# Altium PCB ELRS-RX-MODULE-V11-20260204.PcbDoc
Units mil, origin at the board's own origin, x right, y up, seen from the top; angles counter-clockwise.
Board outline 433.07 x 669.29 mil, 4 copper layers (TOP, L2, L3, BOTTOM), stack 28.8 mil thick; 75 components, 48 nets, 205 pads, 183 vias.
Unrouted connection lines stored in the file: 125.
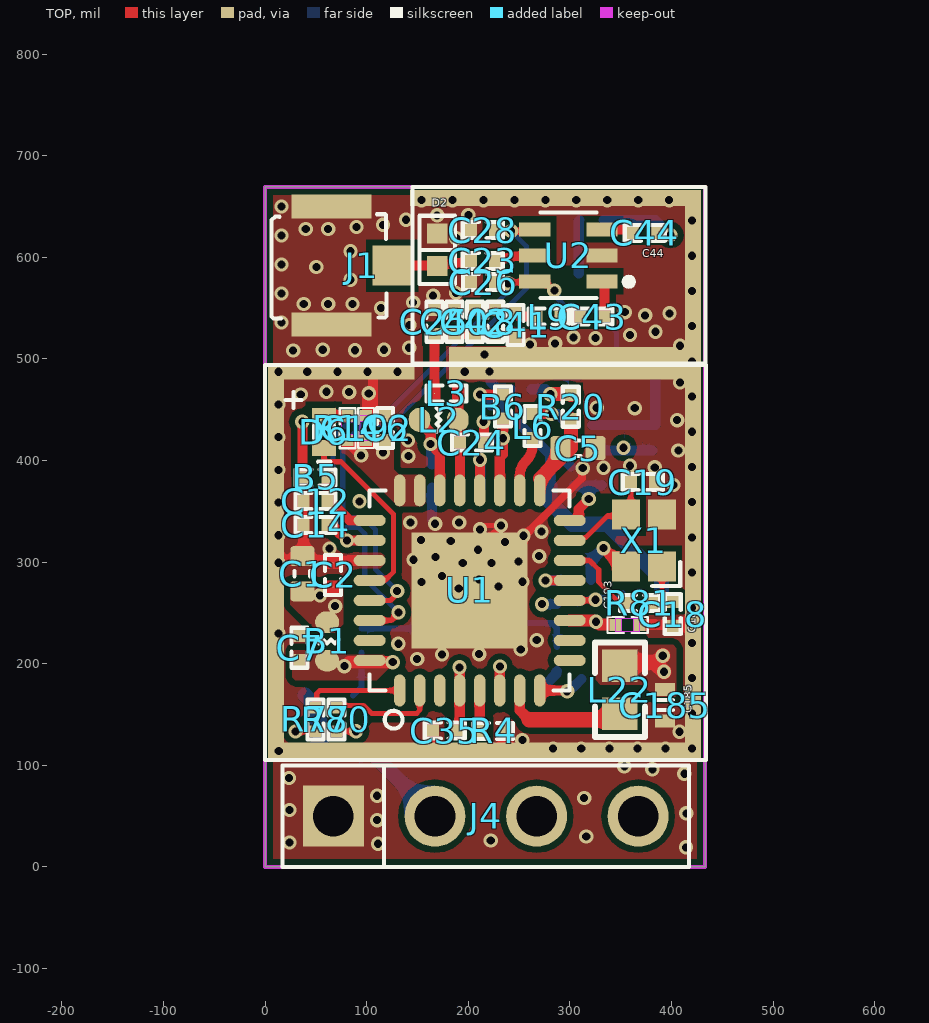
[diagram p0: TOP view]
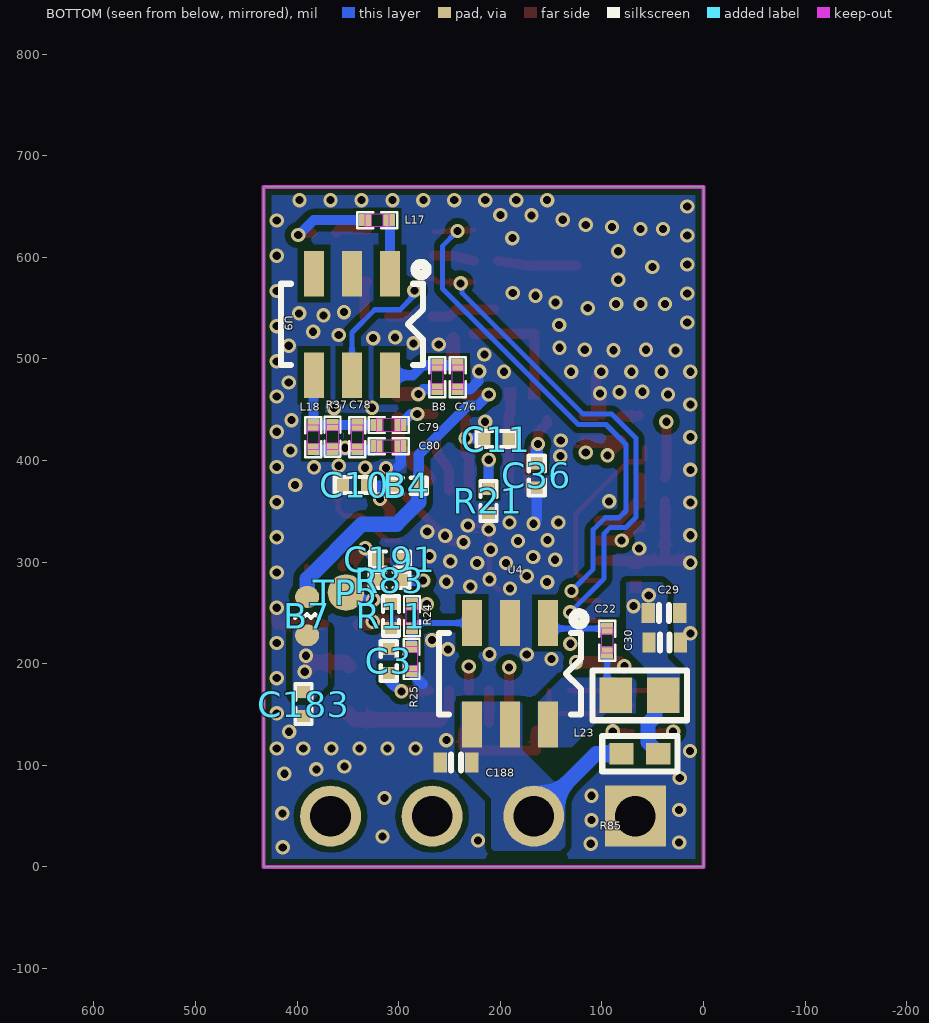
[diagram p1: BOTTOM view, seen from below]
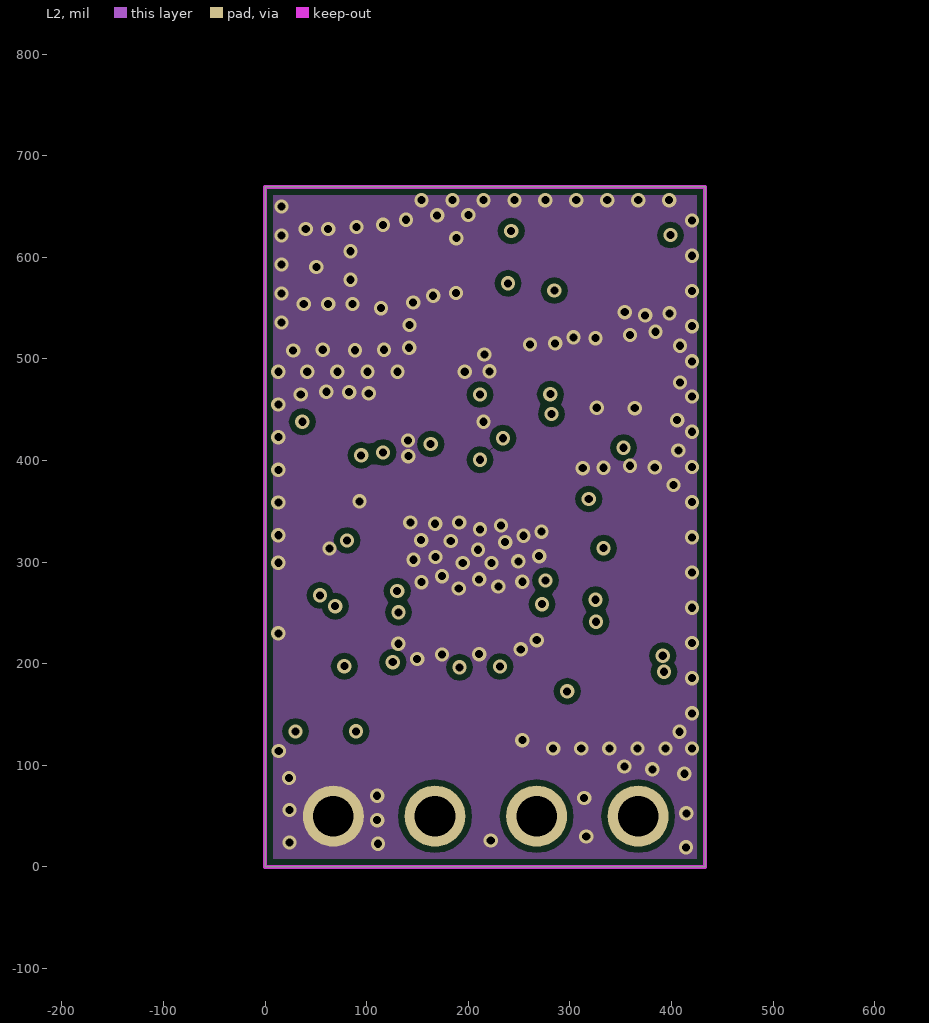
[diagram p2: L2]
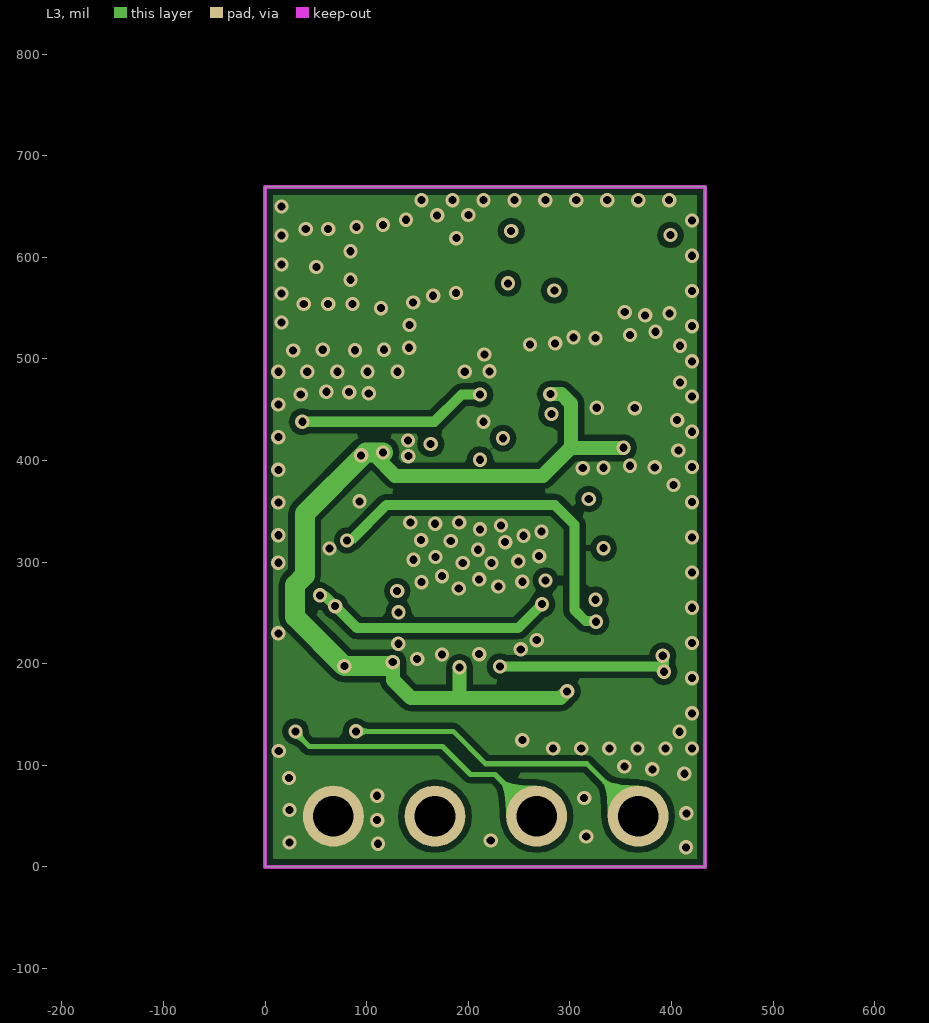
[diagram p3: L3]

## Layer stack, top to bottom
Top Solder: solder mask 0.4, Solder Resist, Dk 3.5
TOP: signal copper 1.2
Dielectric 1: core 8, FR-4, Dk 4.5
L2: signal copper 1.2
Dielectric2: core 8, FR-4, Dk 4.5
L3: signal copper 1.2
Dielectric3: core 8, FR-4, Dk 4.5
BOTTOM: signal copper 1.2
Bottom Solder: solder mask 0.4, Solder Resist, Dk 3.5

## Board outline
0,0 433.07,0 433.07,669.29 0,669.29

## Design rules (kind name [scope] priority, off if disabled: settings)
Clearance poly [All vs InPoly] p1: gap=5.91 ignorepadtopadclearanceinfootprint=TRUE
Clearance [All vs (OnLayer('Keep-Out Layer'))] p2: gap=4 ignorepadtopadclearanceinfootprint=TRUE except(0: Arc-Fill Arc-Poly Arc-Region Track-Fill Track-Poly Track-Region SMDPad-Fill SMDPad-Poly SMDPad-Region THPad-Via THPad-Fill THPad-Poly THPad-Region Via-Fill Via-Poly Via-Region Fill-Fill Fill-Poly Fill-Region Poly-Poly Poly-Region Region-Region)
ComponentClearance [All] p1: gap=0 collisioncheckmode=3 verticalgap=0 showdistances=FALSE
HoleSize [All] p1: absolutevalues=TRUE maxlimit=800 minlimit=1 maxpercent=80.000 minpercent=20.000
HoleToHoleClearance [All] p1: gap=0 allowstackedmicrovias=TRUE
MinimumSolderMaskSliver [All] p1: minsoldermaskwidth=0
PlaneConnect [All] p1: planeconnectstyle=Direct reliefexpansion=20 reliefentries=4 reliefconductorwidth=10 reliefairgap=10
PolygonConnect [All] p1: connectstyle=Direct reliefconductorwidth=10 reliefentries=4 polygonreliefangle="90 Angle" airgapwidth=10
RoutingVias [All] p1: holewidth=7.99 width=14 viastyle="Through Hole" minholewidth=7.99 minwidth=14 maxholewidth=7.99 maxwidth=14
SilkToSilkClearance [All] p1: silktosilkclearance=0
SilkToSolderMaskClearance [IsPad] p1: minsilkscreentomaskgap=0 clearancetoexposedcopper=TRUE
SolderMaskExpansion [All] p1: expansion=4 istentingtop=FALSE
SupplyNets "Schematic Supply Nets_11" [InNet('GND')] p1: voltage=0.000
SupplyNets "Schematic Supply Nets_1" [InNet('VBAT_BG-3V3')] p2: voltage=0.000
SupplyNets "Schematic Supply Nets_4" [InNet('VBAT_3V3')] p3: voltage=0.000
SupplyNets "Schematic Supply Nets_10" [InNet('VREG_1V5_OUT')] p4: voltage=0.000
SupplyNets "Schematic Supply Nets_9" [InNet('VDD_IO_1V8')] p5: voltage=0.000
SupplyNets "Schematic Supply Nets_8" [InNet('VCC_5V')] p6: voltage=0.000
SupplyNets "Schematic Supply Nets_7" [InNet('AVDD_SX_1V5')] p7: voltage=0.000
SupplyNets "Schematic Supply Nets_6" [InNet('VDD_DCIN_1V5')] p8: voltage=0.000
SupplyNets "Schematic Supply Nets_3" [InNet('VCC_3V3')] p9: voltage=0.000
SupplyNets "Schematic Supply Nets_2" [InNet('AVDD_TX_1V5')] p10: voltage=0.000
SupplyNets "Schematic Supply Nets" [InNet('PALDO1V3_OUT')] p11: voltage=0.000
Width [All] p1: maxlimit=100 minlimit=5 preferedwidth=10
23 further rules are at their usual default settings.

## Classes and differential pairs
component class 01_SOC: C18 C19 C191 R4 R11 R21 R81 R83 U1 X1
component class 02_RF: B8 C23 C24 C25 C26 C28 C36 C40 C41 C42 C43 C44 C76 C78 C79 C80 D2 J1 L2 L3 L6 L8 L9 L17 L18 R37 U2 U9
component class 03_Power: B1 B4 B5 B6 B7 C1 C2 C3 C5 C6 C7 C10 C11 C12 C14 C22 C29 C30 C35 C183 C185 C188 C192 C193 L22 L23 R20 R24 R25 R85 U4
component class 04_UART: D6 J4 R14 R77 R80 TP5

## Components (designator, comment, footprint, x,y, rotation, side; value= is the part's Value field where it differs from the comment)
B1 "120_100MHz" L0402 61.02,222.05 r90 top
B4 "1KR_100MHz/200mA" 0201#1 292.13,375.2 r0 bottom
B5 "1KR_100MHz/200mA" 0201#1 49.61,383.46 r0 top
B6 "1KR_100MHz/200mA" 0201#1 234.01,453 r270 top
B7 "120_100MHz" L0402 390.16,246.85 r270 bottom
B8 "1KR_100MHz/200mA" 0201#2 262,482 r270 bottom
C1 "22uF/16V" C0402 36.61,288.58 r90 top
C2 "1uF/10V" 0201#3 66.93,287.4 r90 top
C3 "100nF/10V" 0201#1 309.84,202.76 r90 bottom
C5 "22uF/16V" C0402 307.88,412.2 r0 top
C6 "100nF/10V" 0201#1 118.06,432.17 r90 top
C7 "100nF/10V" 0201#1 33.86,215.75 r90 top
C10 "100nF/10V" 0201#1 343.31,375.98 r0 bottom
C11 "100nF/10V" 0201#1 204,421.21 r180 bottom
C12 "100nF/10V" 0201#1 49.61,360.04 r180 top
C14 "100nF/10V" 0201#1 49.61,336.61 r180 top
C18 "8pF/6.3V/NC" 0201#1 401.18,248.82 r270 top
C19 "8pF/6.3V" 0201#1 371.65,378.74 r0 top
C22 "22nF" 0201#2 94.88,222.83 r270 bottom
C23 "56pF/6.3V" 0201#1 214.17,596.46 r180 top
C24 "NC" 0201#1 203.5,417.68 r0 top
C25 "NC" 0201#1 166.54,536.62 r90 top
C26 "100nF/10V" 0201#1 214.57,575.59 r180 top
C28 "100nF/10V" 0201#1 214.17,626.77 r180 top
C29 "10uF 10V" 0402C_MIN 38.98,250 r180 bottom
C30 "10uF 10V" 0402C_MIN 38.19,220.87 r180 bottom
C35 "100nF/10V" 0201#1 176.77,134.25 r180 top
C36 "100nF/10V" 0201#1 164.17,385.43 r270 bottom
C40 "6.8pF" 0201#1 186.52,536.62 r90 top
C41 "4.3pF" 0201#1 246.46,533.47 r270 top
C42 "1.5pF" 0201#1 206.5,536.62 r90 top
C43 "56pF/6.3V" 0201#1 322.05,541.73 r0 top
C44 "56pF/6.3V" 0201#1 373.62,624.02 r180 top
C76 "100nF 16V" 0201#2 242,482 r90 bottom
C78 "2.2pF" 0201#2 340.85,422.98 r270 bottom
C79 "1.5pF" 0201#2 310,434.98 r0 bottom
C80 "100nF 16V" 0201#2 310,414.13 r180 bottom
C183 "100nF/10V" 0201#1 393.7,160.24 r90 bottom
C185 "10uF 10V" 0402C_MIN 393.31,159.25 r270 top
C188 "10uF 10V" 0402C_MIN 243.7,102.76 r0 bottom
C191 "100nF/10V" 0201#1 308.66,302.76 r0 bottom
C192 "1uF/10V" 0201#2 99.31,432 r90 top
C193 "100nF/10V" 0201#2 356.69,238.19 r0 top
D2 "RCLAMP0521P.TCT-MS" TVS-0402 169.29,607.48 r90 top
D6 "LED_Green" LED0402 57.87,428.35 r90 top
J1 "IPEX-1" IPEX-1 95.15,591.93 r180 top
J4 "CON4" SIP1X4P 217.15,50 r0 top
L2 "220nH LQW15CNR22J10D" L0402 170.79,440.03 r180 top
L3 "4.7nH" 0201#3 178.35,466.14 r180 top
L6 "12nH" 0201#1 263.25,434.01 r90 top
L8 "7.5nH" 0201#1 226.48,536.62 r90 top
L9 "8.2nH" 0201#1 278.74,541.73 r0 top
L17 "7.5nH" 0201#2 321.26,636.61 r0 bottom
L18 "6.2nH" 0201#2 384,422.98 r270 bottom
L22 "2.2UH 0.75A" C0603 349.21,174.41 r90 top
L23 "4.7uH" R0603 62.99,168.9 r180 bottom
R4 "100K/1%" 0201#1 224.41,133.86 r0 top
R11 "100K/1%" 0201#1 307.48,246.85 r270 bottom
R14 "1K" 0201#2 81.1,431.89 r270 top
R20 "1KR_100MHz/200mA" 0201#1 300.79,452.95 r270 top
R21 "49.9k/1%" 0201#1 211.81,360.24 r270 bottom
R24 "100K" 0201#2 287.01,246.85 r270 bottom
R25 "24K" 0201#2 287.4,204.73 r270 bottom
R37 "750R" 0201#2 365.18,423.37 r90 bottom
R77 "22" 0201#1 49.61,145.28 r270 top
R80 "22" 0201#1 70.08,145.28 r270 top
R81 "NC" 0201#1 368.9,259.84 r0 top
R83 "0R" 0201#1 309.06,282.28 r0 bottom
R85 "0R_NC" R0402 62.71,111.42 r180 bottom
TP5 "NC" TP1_6MM 351.97,270.08 r180 bottom
U1 "TK8620" QFN32_8620 201.33,272.17 r90 top
U2 "AS179-92" SC70-6 298.36,601.92 r90 top
U4 "MT2492" SOT23-6 190.55,190.16 r270 bottom
U9 "MS2630" SOT23-6 346,534 r270 bottom
X1 "X1E0002510059" SMD2016-4P 372.83,321.26 r90 top

## Footprints (in the part's own frame and the unit in brackets; to place one, negate y for a bottom-side part, rotate by r counter-clockwise, add the part's x,y. Pads: shape width x height; smd on the part's side, far side on the other; paste and mask are expansions set on the pad)
0201#1 [mil] "0201"
  rect 11.81x11.81 smd: 1(-11.81,0) 2(11.81,0)
  silkscreen extent -20,-8 20,8, body extent -21,-9 21,9, height 150
0201#2 [mil] "0201"
  rect 11.81x11.81 smd: 1(-11.81,0) 2(11.81,0)
  TOP keep-out region: -5.98,5.98 -5.98,-5.98 5.98,-5.98 5.98,5.98
  TOP keep-out region: -12.01,5.98 -12.01,-5.98 12.01,-5.98 12.01,5.98
  silkscreen extent -20,-8 20,8, body extent -21,-9 21,9, height 150
0201#3 [mil] "0201"
  round 1 smd: 1(-11.81,0) 2(11.81,0)
  TOP region: 17.71,5.9 5.9,5.9 5.9,-5.9 17.71,-5.9
  TOP region: -5.9,5.9 -17.71,5.9 -17.71,-5.9 -5.9,-5.9
  silkscreen extent -20,-8 20,8, body extent -21,-9 21,9, height 150
0402C_MIN [mil] "0402C_MIN"
  rect 12.99x19.69 smd: 1(-15.55,0) 2(15.55,0)
  silkscreen extent -5,-8 5,8, body extent -27,-15 27,15, height 150
C0402 [mil] "C0402"
  rrect30% 19.67x23.61 smd: 1(-17.32,0) 2(17.32,0)
  silkscreen extent -2,-7 3,8, body extent -35,-17 35,18, height 150
C0603 [mil] "C0603"
  rect 32x35 smd: 1(-23.5,0) 2(23.5,0)
  silkscreen extent -46,-25 46,25, body extent -49,-27 49,27, height 150
IPEX-1 [mm] "IPEX-1"
  rect 1x1 smd: 1(-0.762,0)
  rect 2x0.6 smd: 2(0.762,-1.476) 3(0.762,1.476)
  silkscreen extent -0.62,-1.28 2.26,1.32, body extent -1.36,-2.08 1.94,2.08, height 3.81
L0402 [mm] "L0402"
  oval 0.54x0.6 smd: 1(0.48,0) 2(-0.48,0)
  silkscreen extent -0.05,-0.3 0.05,0.3, body extent -0.8,-0.4 0.8,0.4, height 3.81
LED0402 [mil] "LED0402"
  rect 15.75x23.62 smd: 1(15.75,0) 2(-15.75,0)
  silkscreen extent -30,-10 39,38, body extent -32,-13 45,13, height 150
QFN32_8620 [mil] "QFN32_8620"
  oval 31.5x11.02 smd: 1(-98.43,68.9) 2(-98.43,49.21) 3(-98.43,29.53) 4(-98.43,9.84) 5(-98.43,-9.84) 6(-98.43,-29.53) 7(-98.43,-49.21) 8(-98.43,-68.9) 17(98.43,-68.9) 18(98.43,-49.21) 19(98.43,-29.53) 20(98.43,-9.84) 21(98.43,9.84) 22(98.43,29.53) 23(98.43,49.21) 24(98.43,68.9)
  oval 11.02x31.5 smd: 9(-68.9,-98.43) 10(-49.21,-98.43) 11(-29.53,-98.43) 12(-9.84,-98.43) 13(9.84,-98.43) 14(29.53,-98.43) 15(49.21,-98.43) 16(68.9,-98.43) 25(68.9,98.43) 26(49.21,98.43) 27(29.53,98.43) 28(9.84,98.43) 29(-9.84,98.43) 30(-29.53,98.43) 31(-49.21,98.43) 32(-68.9,98.43)
  rect 114.17x114.17 smd: 33(0,0)
  silkscreen extent -136,-98 98,98, body extent -118,-118 118,118, height 150
R0402 [mil] "R0402"
  rect 24x21 smd: 1(-18,0) 2(18,0)
  silkscreen extent -37,-18 37,18, body extent -40,-20 40,20, height 150
R0603 [mil] "R0603"
  rect 32x35 smd: 1(-23.5,0) 2(23.5,0)
  silkscreen extent -46,-25 46,25, body extent -49,-27 49,27, height 150
SC70-6 [mm] "SC70-6"
  rect 0.35x0.78 smd: 1(-0.65,-0.84) 2(0,-0.84) 3(0.65,-0.84) 4(0.65,0.84) 5(0,0.84) 6(-0.65,0.84)
  silkscreen extent -1.07,-1.69 1.07,0.7, body extent -1.19,-1.36 1.19,1.36, height 3.81
SIP1X4P [mil] "SIP1X4P"
  rect 60x60 / inner round 60 / far side rect 60x60 hole 40: 1(-150,0)
  round 60 hole 40: 2(-50,0) 3(50,0) 4(150,0)
  silkscreen extent -200,-50 200,50
SMD2016-4P [mm] "SMD2016-4P"
  rect 0.749x0.701 smd: 1(-0.65,-0.45) 2(0.65,-0.45) 3(0.65,0.45) 4(-0.65,0.45)
  silkscreen extent -1.14,-0.91 -0.54,-0.21, body extent -1.16,-0.85 1.07,0.93, height 3.81
SOT23-6 [mil] "SOT23-6"
  rect 45x20 smd: 1(-50,37.4) 2(-50,0) 3(-50,-37.4) 4(50,-37.4) 5(50,0) 6(50,37.4)
  silkscreen extent -60,-70 40,74, body extent -90,-70 90,70, height 150
TP1_6MM [mil] "TP1_6MM"
  round 36 smd: 1(0,0)
  body extent -20,-20 20,20, height 150
TVS-0402 [mil] "TVS-0402"
  rect 20x20 smd: 1(-15.98,0) 2(15.98,0)
  silkscreen extent -34,-18 34,17, body extent -22,-12 22,12, height 150

## Part data
B1: library part 1212_BEAD_0, "FERRITE CHIP 120 OHM 500MA 0402", Manufacture Part Number=BLM15AG121SN1D, Oper. Temp. Range="-55C to 85C", Package=L0201, Tolerance=25%, CLASS=DISCRETE, eI Part#=04_00075_01, Mfg=Murata, Mfg Part#=BLM15AG121SN1D, Part Reference=B1, PCB Footprint=l0402, ProcessType=SMT, RoHS=Yes, Vendor=DigiKey, Vendor Part#=490-1005-1-ND
B4 B5 B6 B7: library part 1212_BEAD_0, "FERRITE CHIP 120 OHM 500MA 0402", Manufacture Part Number=BLM15AG121SN1D, Oper. Temp. Range="-55C to 85C", Package=0402, Tolerance=25%, CLASS=DISCRETE, eI Part#=04_00075_01, Mfg=Murata, Mfg Part#=BLM15AG121SN1D, ProcessType=SMT, RoHS=Yes, Vendor=DigiKey, Vendor Part#=490-1005-1-ND
  B4: Part Reference=B4, PCB Footprint=0201
  B5: Part Reference=B5, PCB Footprint=0201
  B6: Part Reference=B6, PCB Footprint=0201
  B7: Part Reference=B7, PCB Footprint=l0402
B8 L23: library part INDUCTOR_Dup1
  B8: FPLIST=0402R_S,0402R,0402R_M,0402R_MIN,R0402, Part Reference=B8, PCB Footprint=0201, Reviewed2=LBY, 型号="1.5K 1%", 存货名称=贴片电阻, 存货简称=TURBO, 存货编码=040101070, 规格=贴装碳膜电阻器－1.5KR－±1%－1/16W－0402
  L23: Part Reference=L23, PCB Footprint=R0603, Reviewed=LBY
C1: library part "Ceramic Capacitor", "Ceramic Capacitor, 10uF,+/-20%,X6S,16V,SMD,0603", Manufacturer=Murata, Manufacturer P/N=GRM188C81C106MA73D, Reserve Value=10uF, Datasheet="Ceramic Capacitor.pdf", Myir P/N=2040100037, Part Reference=C1, Part Type="Ceramic Capacitor", PCB Footprint=C0402
C2 C192: library part "Ceramic Capacitor", "Ceramic Capacitor,4.7uF 10V 0402,SUMSUNG", Manufacturer=Samsung, Manufacturer P/N=CL05A475MP5NRNC, Reserve Value=4.7uF, Datasheet=CL05A475MP5NRNC.pdf, Myir P/N=2040180055, Part Type="Ceramic Capacitor", PCB Footprint=0201
  C2: Part Reference=C2
  C192: Part Reference=C192
C3 C5 C6 C7 C10 C11 C12 C14 C26 C28 C35 C36 C193: library part "Ceramic Capacitor_14", "Ceramic Capacitor,100nF,50V,+/-10%,X7R,0402,Fenghua", Manufacturer=Fenghua, Manufacturer P/N=0402B104K500NT, Reserve Value=100nF, Datasheet="附件7 风华片容全系列承认书.pdf", Myir P/N=2040180111, Part Type="Ceramic Capacitor"
  C3: Part Reference=C3, PCB Footprint=0201
  C5: Part Reference=C5, PCB Footprint=C0402
  C6: Part Reference=C6, PCB Footprint=0201
  C7: Part Reference=C7, PCB Footprint=0201
  C10: Part Reference=C10, PCB Footprint=0201
  C11: Part Reference=C11, PCB Footprint=0201
  C12: Part Reference=C12, PCB Footprint=0201
  C14: Part Reference=C14, PCB Footprint=0201
  C26: Part Reference=C26, PCB Footprint=0201
  C28: Part Reference=C28, PCB Footprint=0201
  C35: Part Reference=C35, PCB Footprint=0201
  C36: Part Reference=C36, PCB Footprint=0201
  C193: Part Reference=C193, PCB Footprint=0201
C18 C19 C23 C24 C25 C40 C41 C42 C43 C44 C76 C78 C79 C80 C191: library part "Ceramic Capacitor", "Ceramic Capacitor,22uF,6.3V,+/-20%,X5R,0603,Samsung", Manufacturer=Samsung, Manufacturer P/N=CL10A226MQ8NRNC, Reserve Value=22uF, Datasheet=Samsung.pdf, Myir P/N=20401.00086, Part Type="Ceramic Capacitor", PCB Footprint=0201
  C18: Part Reference=C18
  C19: Part Reference=C19
  C23: Part Reference=C23
  C24: Part Reference=C24
  C25: Part Reference=C25
  C40: Part Reference=C40
  C41: Part Reference=C41
  C42: Part Reference=C42
  C43: Part Reference=C43
  C44: Part Reference=C44
  C76: Part Reference=C76
  C78: Part Reference=C78
  C79: Part Reference=C79
  C80: Part Reference=C80
  C191: Part Reference=C191
C22 C29 C30: library part "CAPACITOR NON-POL"
  C22: Part Reference=C22, PCB Footprint=0201
  C29: Part Reference=C29, PCB Footprint=0402C_MIN
  C30: Part Reference=C30, PCB Footprint=0402C_MIN
C183 C185 C188: library part CAP_NP, FPLIST=0402C_S,0402C,0402C_M,0402C_MIN,0402C-BGA,C0402, 存货名称=贴片电容, 存货简称=TURBO
  C183: Part Reference=C183, PCB Footprint=0201, 型号="100nF 16V", 存货编码=040203017, 规格=贴片电容－0.1uF－±10%－16V－X7R－0402
  C185: Part Reference=C185, PCB Footprint=0402C_MIN, 型号="10uF 6.3V", 存货编码=040203157, 规格=贴片电容－10uF－±20%－6.3V－X5R－0402
  C188: Part Reference=C188, PCB Footprint=0402C_MIN, 型号="10uF 6.3V", 存货编码=040203157, 规格=贴片电容－10uF－±20%－6.3V－X5R－0402
D2: library part TVS, Part Reference=D2, PCB Footprint=TVS-0402
D6: library part MFOE1101_0, Part Reference=D6, PCB Footprint=LED0402
L2 L3 L6 L8 L9 L22: library part INDUCTOR_Dup2
  L2: Part Reference=L2, PCB Footprint=L0402
  L3: Part Reference=L3, PCB Footprint=0201
  L6: Part Reference=L6, PCB Footprint=0201
  L8: Part Reference=L8, PCB Footprint=0201
  L9: Part Reference=L9, PCB Footprint=0201
  L22: FPLIST=0603L_S,0603L,0603L_M,0603L_MIN, Part Reference=L22, PCB Footprint=C0603, Reviewed2=LBY
L17 L18: library part INDUCTOR, PCB Footprint=0201
  L17: Part Reference=L17
  L18: Part Reference=L18
R4 R11 R20 R21 R37 R81: library part Resister, "Thick Film Resistor,0R,+/-5%,1/16W,-55°C ~ 155°C,SMD,0402,Fenghua", Manufacturer=Fenghua, Manufacturer P/N=RC-02000JT, Reserve Value=0R, Datasheet=FH规格书_2018-07-30.pdf, Myir P/N=20301.00186, Part Type="Thick Film Resistor", PCB Footprint=0201
  R4: Part Reference=R4
  R11: Part Reference=R11
  R20: Part Reference=R20
  R21: Part Reference=R21
  R37: Part Reference=R37
  R81: Part Reference=R81
R14: library part R_0, Part Reference=R14, PCB Footprint=0201
R24 R25 R85: library part R
  R24: Part Reference=R24, PCB Footprint=0201
  R25: Part Reference=R25, PCB Footprint=0201
  R85: Part Reference=R85, PCB Footprint=R0402
R77 R80: library part RES, FPLIST=0402R_S,0402R,0402R_M,0402R_MIN,R0402, PCB Footprint=0201, 型号="110K 1%", 存货名称=贴片电阻, 存货简称=TURBO, 存货编码=040101199, 规格=贴装碳膜电阻器－110KR－±1%－1/16W－0402
  R77: Part Reference=R77
  R80: Part Reference=R80
R83: library part Resister, "Thick Film Resistor,0R,+/-5%,1/16W,-55°C ~ 155°C,SMD,0402,Fenghua", Manufacturer=Fenghua, Manufacturer P/N=RC-02000JT, Datasheet=FH规格书_2018-07-30.pdf, Myir P/N=20301.00186, Part Reference=R83, Part Type="Thick Film Resistor", PCB Footprint=0201, Reserve Value=0R
TP5: library part "T POINT R", Part Reference=TP5, PCB Footprint=TP1_6MM
U1: library part K2201A_3, Part Reference=U1, PCB Footprint=QFN32_8620
X1: library part Crystal_32M, Part Reference=X1, PCB Footprint=smd2016-4p
J1: Part Reference=J1, PCB Footprint=IPEX-1
J4: Part Reference=J4, PCB Footprint=SIP1X4P
U2: Part Reference=U2, PCB Footprint=SC70-6
U4: Part Reference=U4, PCB Footprint=SOT23-6
U9: Part Reference=U9, PCB Footprint=SOT23-6

## Free pads (board coordinates)
  rect 15.75x385.83 smd: 0(10.63,302.76) 0(420.87,299.61)
  rect 141.73x15.75 smd: 0(75.98,487.8)
  rect 426x15.75 smd: 0(215.75,114.57)
  rect 275.59x15.75 smd: 0(280.31,658.46)
  rect 236.22x15.75 smd: 0(298.82,503.94)
  rect 248.03x15.75 smd: 0(304.72,487.8)
  rect 15.75x175.2 smd: 0(420.87,578.74)

## Via types
v1: diameter 14, hole 7.99, TOP to BOTTOM, tented both sides, 117 vias
v2: diameter 14, hole 7.99, TOP to BOTTOM, 50 vias
v3: diameter 14, hole 8, TOP to BOTTOM, tented both sides, 16 vias

## Nets (pads, with @x,y where several pads share a name; then routed paths per layer and width w, separated by ;. In a path a pad name is that pad's centre, name@x,y a point inside that pad or via, vN(x,y) a via of type N, cw(c..) or ccw(c..) an arc to the next point about the centre after c; other vN are vias at no path point)
AVDD_SX_1V5: B4.2 C10.1 U1.16 | length 74.7
  TOP w10: U1.16 308.19,341.07 308.66,341.54 308.66,352.36 v3(318.5,362.2)
  BOTTOM w10: B4.2 330.71,375.2 C10.1 ; v3(318.5,362.2) 318.5,375.2
AVDD_TX_1V5: B5.2 C12.1 U1.25 | length 71.2
  TOP w10: B5.2@61.81,383.46 61.81,363.39 61.42,362.99 83.34,341.07 U1.25
BUCK_SW: L22.1 U1.7 | length 124.6
  TOP w10: U1.7 250.54,154.18 259.84,144.88
  TOP w15: 259.84,144.88 343.19,144.88 L22.1
DC_TP: R21.1 U1.20 | length 46.6
  TOP w10: U1.20 211.37,370.8 211.37,381.76 211.42,381.81 v1@211.42,394.49
  BOTTOM w10: v1@211.42,394.49 211.81,394.09 R21.1
  other v1: 211.42,400.79
EFUSE: R4.1 U1.5 | length 32.2
  TOP w10: 211.17,141.59 U1.5
ELRS_RXD: J4.4 R80.2 | length 332.2
  TOP w5: R80.2 86.22,133.47 v3(89.37,133.46)
  L3 w5: v3(89.37,133.46) 185.04,133.46 216.93,101.57 316.54,101.57 367.15,50.96 J4.4
ELRS_TXD: J4.3 R77.2 | length 292.4
  TOP w5: v3@29.95,133.47 R77.2
  L3 w5: v3(29.92,133.44) 29.92,131.89 43.31,118.5 174.52,118.5 202.08,90.94 226.21,90.94 J4.3
GND: C1.2 C2.2 C3.2 C5.2 C6.2 C7.2 C10.2 C11.2 C12.2 C14.2 C18.2 C19.2 C24.2 C25.2 C26.2 C28.2 C29.2 C30.2 C35.2 C36.2 C40.2 C41.2 C76.1 C80.2 C183.1 C185.2 C188.2 C191.1 C192.2 C193.2 D2.2 J1.2 J1.3 J4.1 pad.0 R4.2 R11.2 R21.2 R25.2 U1.27 U1.33 U2.2 U4.2 U9.2 X1.2 | length 746.5
  TOP w5: U1.33 210.56,281.4 210.56,331.43 v1(211.42,332.28) 211.88,332.28 215.6,336 v1(232,336)
  TOP w7.87: C192.2 99.31,461.82 101.97,464.48 v1(101.97,466.14) ; v1(236.22,319.68) 248.85,319.68 U1.33@254.48,325.32 ; U1.33@254.48,325.34 311.7,382.56 311.7,391.62 v1(312.6,392.52)
  TOP w10: pad.0@11.29,301.7 U1.27 ; C1.2 37.8,307.08 C14.2 C12.2 ; pad.0@100.9,487.8 106,482.7 106,443.81 C6.2@118.06,443.81 ; pad.0@164.96,114.57 233.35,114.57 236.22,117.44 R4.2 ; C35.2 164.96,117.44 pad.0@167.84,114.57 ; v1(214.96,438.19) 215.31,437.84 C24.2 ; C193.2@373.62,238.58 pad.0@419.57,238.58 ; pad.0@417.99,238.58 420.87,241.46 pad.0@420.87,255.12
  TOP w13.2: pad.0@246.46,502.85 C41.2@246.46,519.69
  BOTTOM w10: C36.2 164.17,342.03 167.32,338.88 v1(167.32,337.8) ; v2(220.87,487.8) 221.63,487.03 221.63,477.97 229.2,470.41 241.78,470.41 C76.1 ; 276.38,179.92 286.5,190.04 286.5,192.01 R25.2 ; C80.2 298.19,396.69 300.79,394.09
  other v1: 414.17,19.29 111.02,22.83 24,24 222,26 316,30 110.24,46.06 414.57,52.76 24,56 314,68 110.24,70.08 23.42,87.42 412.6,91.73 381.1,96.06 353.54,98.82 253.15,124.8 407.87,133.07 149.61,204.72 174.02,209.06 210.63,209.45 251.57,214.17 131.1,219.68 267.32,223.23 190.55,274.02 229.53,275.98 153.94,280.31 253.15,280.71 210.63,283.07 174.02,286.22 194.49,299.21 222.83,299.21 249.21,300.79 146.06,302.36 167.72,305.12 269.68,305.91 209.45,312.2 182.68,320.87 153.54,321.65 254.33,325.98 272,330 142.91,338.98 190.94,338.98 92.91,359.84 401.97,375.98 333.07,392.91 383.46,393.31 359.06,394.88 140.94,404.33 406.69,409.84 140.55,419.68 405.51,439.76 326.38,451.97 363.78,451.57 35.04,464.96 82.68,467.32 60.24,467.72 408.27,476.77 215.75,504.33 27.56,508.27 56.69,509.06 88.52,508.52 116.93,509.06 260.63,514.17 285.43,515.35 325.2,520.47 303.54,521.26 359.06,523.62 384.25,526.77 16,536 374.02,542.91 398.03,544.88 353.94,546.06 114,550 38,554 62,554 86,554 165.35,562.2 16,564.5 187.8,564.96 84,578 50.39,590.55 16,593 84,606 188.19,618.9 16,621.5 40,628 62,628 90,630 116,632 138.58,637.01 169.29,641.34 200,641.73 16,650
  other v2: 13.39,114.17 283.46,116.54 311.1,116.54 338.74,116.54 366.38,116.54 394.02,116.54 420.08,116.54 420.08,151.18 420.08,185.83 420.08,220.47 12.99,229.92 420.08,255.12 420.08,289.76 12.99,299.41 63.39,313.39 420.08,324.41 12.99,326.48 12.99,358.66 420.08,359.05 12.99,390.85 420.08,393.7 12.99,423.03 420.08,428.35 12.99,455.22 420.08,462.99 12.99,487.4 41.44,487.4 71.06,487.4 100.69,487.4 130.31,487.4 196.46,487.4 420.08,497.64 141.73,511.02 408.27,512.99 420.08,532.28 142.13,533.46 145.67,555.51 420.08,566.93 420.08,601.57 420.08,636.22 153.94,656.3 184.4,656.3 214.86,656.3 245.32,656.3 275.79,656.3 306.25,656.3 336.71,656.3 367.18,656.3 397.64,656.3
GPIO_0: D6.2 U1.28 | length 185.5
  TOP w5: D6.2 57.87,401.75 60.8,398.82 74.67,398.82 98.13,375.36 126.15,347.34 126.15,290.16 118,282.01 U1.28
GPIO_1: C28.1 U1.29 U2.4 | length 553.4
  TOP w5: U1.29 123.37,262.33 128.2,267.16 128.2,269.93 v1(129.92,271.65) ; C28.1 229.39,626.63 242.13,626.11 252.44,625.68 U2.4@265.29,625.15
  BOTTOM w5: v1(129.92,271.65) 108.66,292.91 108.66,331.89 96.85,343.7 83.07,343.7 76.38,350.39 76.38,415.75 96.06,435.43 123.23,435.43 257.09,569.29 257.09,611.02 v1(242.13,625.98)
GPIO_2: C26.1 U1.30 U2.6 U9.5 | length 668
  TOP w5: U1.30 124.06,242.64 131.15,249.73 v1(131.15,250.61) ; C26.1 261.8,575.59 265.29,579.09 273.76,579.09 278.15,574.7 278.15,573.82 v3(284.65,567.32)
  BOTTOM w5: v1(131.15,250.61) 98.03,283.73 98.03,327.95 91.73,334.25 76.38,334.25 66.67,343.96 66.67,422.18 90.16,445.67 118.5,445.67 237.9,565.07 237.9,573.24 v1(239.07,574.41) ; v3(284.65,567.32) 286.37,565.6 286.37,560.88 298.82,548.43 323.62,548.43 346,526.05 U9.5
GPIO_3: U1.31
GPIO_4: R77.1 U1.1 | length 97.1
  TOP w5: R77.1 50.79,158.27 50.79,170.81 53.72,173.74 U1.1
GPIO_5: R80.1 U1.2 | length 106.1
  TOP w5: R80.1@70.08,159.06 96.85,159.06 104.72,151.18 149.19,151.18 152.12,154.11 U1.2
GPIO_6: U1.3
NetB4_1: B4.1 B5.1 B6.1 B7.2 | length 562.7
  TOP w10: v3(36.61,438.19) 36.61,389.39 36.89,389.11 36.89,384.37 B5.1 ; v1(211.42,464.96) 211.57,464.81 B6.1
  L3 w10: v3(36.61,438.19) 166.54,438.19 193.35,465 v1(211.42,464.96) v1(211.42,464.96)
  BOTTOM w10: v1(211.42,464.96) 222.05,454.33 231.66,454.33 280.32,405.67 B4.1
  BOTTOM w15: B4.1 280.32,359.05 301.97,337.4 336.22,337.4 390,283.62 390,265.91 B7.2
NetB8_1: B8.1 C76.2 U9.6 | length 70.7
  BOTTOM w10: C76.2 B8.1 276.19,493.81 286,484 U9.6
NetC18_1: C18.1 R81.2 X1.1 | length 60.2
  TOP w5: R81.2 400.39,259.84 C18.1 390.55,271.26 X1.1
NetC22_1: C22.1 U4.1 | length 60.6
  BOTTOM w6: C22.1 147.64,234.64 U4.1
NetC22_2: C22.2 L23.1 U4.6 | length 45.6
  BOTTOM w6: L23.1 94.88,177.29 C22.2
NetC23_1: C23.1 U2.5 | length 39.9
  TOP w10: C23.1 243.87,600.93 254.94,601.55 U2.5
NetC25_1: C25.1 C40.1 C42.1 L3.2 L8.1 | length 108
  TOP w10: 166.54,471.65 C25.1@166.54,519.68 ; C25.1 C40.1 L8.1
NetC41_1: C41.1 C42.2 L8.2 L9.1 | length 63.2
  TOP w10: C42.2 L8.2 243.31,548.43 C41.1 250,541.73 L9.1
NetC43_1: C43.1 L9.2 | length 19.7
  TOP w10: L9.2@289.94,541.73 C43.1@309.63,541.73
NetC43_2: C43.2 U2.1 | length 36.9
  TOP w10: U2.1 333.57,576.33 333.86,576.04 C43.2
NetC44_1: C44.1 L17.2 | length 86.2
  TOP w10: C44.1 396.54,624.02 398.67,621.89 v1(398.88,621.89)
  BOTTOM w10: L17.2 383.94,636.61 398.67,621.89 v1(398.88,621.89)
NetC44_2: C44.2 U2.3 | length 31.8
  TOP w10: U2.3 331.65,627.3 358.53,627.3 C44.2
NetC78_1: C78.1 C79.2 L18.1 R37.2 U9.4 | length 111.5
  BOTTOM w10: C79.2 340.85,434.99 365.18,434.99 384,434.99 384,483.4 U9.4
NetC79_1: C79.1 L6.2 | length 36.3
  TOP w10: L6.2@266.01,445.82 v1(281.82,445.82)
  BOTTOM w10: v1(281.82,445.82) 281.97,445.67 288.29,445.67 C79.1@298.19,435.76
NetC191_2: C191.2 R83.2 X1.4 | length 67.9
  TOP w10: v3(333.07,313.78) 341.44,305.41 346.31,305.41 355.11,296.61 X1.4
  BOTTOM w10: R83.2 320.87,302.36 C191.2 321.38,303.66 322.95,303.66 v3(333.07,313.78)
NetD6_1: D6.1 R14.1 | length 17.5
  TOP w10: D6.1@63.78,444.1 64.18,443.7 R14.1
NetL17_1: L17.1 U9.1 | length 53
  BOTTOM w10: U9.1 308.6,635.76 L17.1
NetR24_2: R24.2 R25.1 U4.3 | length 79.8
  BOTTOM w6: U4.3 281.89,240.16 R24.2 287.01,216.93 R25.1
OSC32M_N: R81.1 U1.14 | length 81.8
  TOP w5: U1.14 319.17,301.7 328.35,292.52 328.35,280.31 346.55,262.11 354.82,262.11 R81.1
OSC32M_P: C19.1 U1.15 X1.3 | length 99.8
  TOP w5: U1.15 311.63,321.38 314.47,324.22 315.56,324.22 336.74,345.4 353.67,345.4 359.84,351.58 C19.1
PALDO1V3_OUT: C36.1 L2.1 U1.22 | length 96.1
  TOP w10: L2.1@154.04,439.91 154.04,436.24 162.92,427.36 v1(162.92,416.21) 171.8,407.33 U1.22
  BOTTOM w12: v1(162.92,416.21) 162.92,415.67 164.17,414.42 C36.1
RF_ANT: C23.2 D2.1 J1.1 | length 77.8
  TOP w10: J1.1 168.86,591.93 D2.1 172.69,592.01 C23.2
RF_IN: L6.1 U1.18 | length 55
  TOP w10: U1.18 250.54,384.75 cw(c271.55,384.75) 256.69,399.61 ccw(c240.85,415.45) 263.25,415.45 L6.1
RF_OUT: C24.1 L2.2 L3.1 U1.21 | length 96.8
  TOP w10: L3.1 190.16,447.19 189.69,446.72 191.69,444.72 191.69,414.53 191.69,370.6 U1.21
RST: R11.1 TP5.1 U1.12 | length 82.7
  TOP w5: U1.12 299.87,262.44 324.65,262.44 v3(325.2,262.99)
  BOTTOM w5: R11.1 310.89,262.06 312.89,262.06 313.81,262.99 v3(325.2,262.99) 326.92,264.71 346.6,264.71 TP5.1 TP5.1@346.46,264.57
VBAT_3V3: B1.2 B8.2 C3.1 C6.1 C7.1 C35.1 C78.2 C80.1 C192.1 L18.2 R14.2 R20.1 R37.1 U1.4 U1.8 U1.23 U1.24 U1.32 | length 1215.7
  TOP w10: v1(94.49,405.12) 82.01,417.6 82.01,419.17 R14.2 117.78,420.08 C6.1 ; C192.1@98.4,419.28 C192.1 C192.1@99.2,420.08 ; C35.1 191.49,137.16 U1.4 191.49,196.31 v3(191.34,196.46) ; U1.8 295.26,173.74 296.16,172.83 v1(297.24,172.83)
  TOP w12: v3(77.95,197.64) 78.49,197.64 82.43,201.57 v3(125.59,201.57)
  TOP w13.78: v3(280.71,465.35) 300.2,465.35 R20.1
  L3 w13.78: v1(94.49,405.12) v1(94.49,405.12) 107.92,405.08 127.95,385.04 273.23,385.04 300.79,412.6 ; v3@121.59,197.64 125.53,201.57 v3(125.59,201.57) 125.59,184.25 143.31,166.54 190.94,166.54 ; v3(191.34,196.46) 191.34,166.93 190.94,166.54 ; v3(280.71,465.35) v3(280.71,465.35) 291.77,465.31 300.79,456.3 300.79,412.6 ; v1(297.24,172.83) v1(297.24,172.83) 290.89,166.54 190.94,166.54 ; v3(352.76,412.6) 300.79,412.6
  L3 w19.68: v1(116,408) 99.25,408 38.98,347.72 38.98,287.01 29.53,277.56 29.53,246.06 v3(77.95,197.64) v3@121.59,197.64
  BOTTOM w10: B8.2 275.87,470.19 v3(280.71,465.35) ; v1(297.24,172.83) 298.33,172.83 303.42,177.93 304.31,177.93 311.42,185.04 ; C80.1@324.92,409.84 L18.2@381.32,409.84
VBAT_BG-3V3: C5.1 R20.2 U1.17 | length 71.5
  TOP w13.78: U1.17@270.43,382.24 300.79,412.6 R20.2
VCC_3V3: B1.1 C1.1 C2.1 C29.1 C30.1 L23.2 R24.1 R85.2 | length 325
  L3 w10: v1(53.94,267.32) 54.7,266.56 59.03,266.56 v1(68.9,256.69) 90.55,235.04 248.82,235.04 v1(272.44,258.66)
  BOTTOM w10: v1(272.44,258.66) R24.1
  BOTTOM w15: L23.2 47.99,160.4 47.99,148.07 54.72,141.34 54.72,122.83 49.21,117.32 49.21,114.42 46.21,111.42 R85.2
VCC_5V: C188.1 J4.2 R85.1 U4.4 U4.5 | length 111.9
  BOTTOM w15: R85.1 105.73,111.42 J4.2
VDD18_XOSC: R83.1 U1.13 | length 39.6
  TOP w10: v1(276,282.01) U1.13
  BOTTOM w10: v1(276,282.01) R83.1@291.88,282.01
VDD_DCIN_1V5: B6.2 C11.1 U1.19 | length 90.1
  TOP w10: U1.19 230.86,402.86 234.01,406.01 v1(234.01,422.01) B6.2
  BOTTOM w10: C11.1@215.82,422.01 v1(234.01,422.01)
VDD_IO_1V8: C14.1 C193.1 U1.11 U1.26 | length 445.3
  TOP w10: C14.1 62.32,335.71 66.26,335.71 v3(80.59,321.38) U1.26
  TOP w12: U1.11 323.75,242.64 325.05,241.34 326.13,241.34 328.89,238.58 C193.1@339.37,238.58
  L3 w10: v3(80.59,321.38) 81.35,322.15 85.14,322.15 119.29,356.3 285.04,356.3 304.33,337.01 304.33,253.15 315.38,242.1 324.83,242.1 v1(325.59,241.34)
VREG_1V5_OUT: B7.1 C183.2 C185.1 L22.2 U1.6 | length 262.1
  TOP w10: U1.6 230.86,197 v3(231.1,197.24)
  TOP w15: L22.2 352.68,201.38 384.84,201.38 ; v3(391.34,207.87) 384.84,201.38 ; v3(392.52,192.13) 384.84,199.8 384.84,201.38
  L3 w10: v3(231.1,197.24) 386.32,197.24 391.44,192.13 v3(392.52,192.13) 392.52,205.61 391.34,206.79 v3(391.34,207.87)
pads on no net: U1.9 U1.10 U9.3

## Polygon pours and split planes (outlines as drawn)
GND on TOP "GND_L01_P027" (solid, remove dead copper, pour order 27): 0,0 433.07,0 433.07,669.29 0,669.29
VBAT_3V3 on TOP "NONET_L03_P-001" (solid, remove dead copper, pour order 26): 75.12,425.9 75.12,407.95 127.95,355.12 154.72,355.12 157.48,357.87 157.48,383.46 154.72,386.22 131.89,386.22 126.77,391.34 126.77,406.69 126.77,425.98
VBAT_3V3 on TOP "NONET_L03_P-001" (solid, remove dead copper, pour order 0): 26.77,213.39 74.41,213.39 79.13,208.66 116.54,208.66 121.7,203.49 121.7,195.72 109.84,183.86 29.53,183.86 26.77,186.61
VCC_3V3 on TOP "NONET_L03_P-001" (solid, remove dead copper, pour order 1): 24.8,280.31 24.8,258.27 52.36,230.71 68.5,230.71 76.77,238.98 76.77,275.2 53.54,275.2 48.03,280.71 25.2,280.71
VREG_1V5_OUT on TOP "NONET_L03_P-001" (solid, remove dead copper, pour order 6): 325.2,184.25 329.92,179.53 371.26,179.53 383.46,167.32 403.54,167.32 404.72,168.5 404.72,215.35 401.57,218.5 325.98,218.5 325.2,217.72
GND on BOTTOM "GND_L04_P028" (solid, remove dead copper, pour order 28): 0,0 433.07,0 433.07,669.29 0,669.29
VCC_5V on BOTTOM "NONET_L03_P-001" (solid, remove dead copper, pour order 3): 180.31,162.6 237.8,162.6 238.98,161.42 238.98,97.24 209.06,67.32 209.06,18.5 206.3,15.75 140.94,15.75 136.22,20.47 136.22,73.23 142.52,79.53 178.35,115.35 178.35,160.63
VREG_1V5_OUT on BOTTOM "NONET_L03_P-001" (solid, remove dead copper, pour order 7): 382.68,166.14 401.97,166.14 404.33,168.5 404.33,231.89 400.79,235.43 370.08,235.43 370.08,178.74
VCC_3V3 on BOTTOM "NONET_L03_P-001" (solid, remove dead copper, pour order 4): 23.82,151.97 43.84,151.97 55.51,163.64 55.51,194.09 75.98,214.57 75.98,246.06 75.98,280.31 41.34,280.31 35.04,274.02 35.04,205.51 23.37,193.84
NetC22_2 on BOTTOM "NONET_L03_P-001" (solid, remove dead copper, pour order 5): 66.54,151.18 96.06,151.18 129.53,117.72 161.81,117.72 163.39,119.29 163.39,162.2 139.37,186.22 66.14,186.22
GND on L2 "GND_L02_P030" (solid, remove dead copper, pour order 30): 0,0 433.07,0 433.07,669.29 0,669.29
GND on L3 "GND_L03_P029" (solid, remove dead copper, pour order 29): 0,0 433.07,0 433.07,669.29 0,669.29

## Keep-outs
Keep-Out Layer:
  the board outline again, w3.94

## Other copper
TOP:
  rectangle net VBAT_3V3: 75.12,412.42 126.77,415.74
  pour cut-out: 43.7,218.5 40.94,221.27 40.94,234.48 48.54,226.88
  pour cut-out: 309.83,591.73 286.22,591.73 286.22,581.33 287.23,580.32 298.42,580.32
BOTTOM:
  pour cut-out: 407,259.26 407,241.65 405.38,240.03 403.48,241.93 370.08,241.93 370.08,254.25 370.42,254.59
  pour cut-out: 168.15,167.66 175.55,167.66 175.55,166.44 174.15,165.04 169.13,165.04 168.15,166.01

## Silkscreen, mask and mechanical layers (free items; w line width, h text height)
Top Overlay:
  lines w3.94: 0,105.12 433.86,105.12 433.86,494.09 0,494.09 0,105.12 ; 144.88,495.34 144.88,669.29 433.46,669.29 433.46,495.34 144.88,495.34
Bottom Paste:
  region: 7.15,105 7.15,662 426.15,662 426.15,105 406,105 406,125 406.15,125 406.15,642 27.15,642 27.15,125 28.15,125 28.15,105
  region: 285.75,105 363.15,105 363.15,125 285.75,125
Bottom Solder:
  region: 7.15,105 7.15,662 426.15,662 426.15,105 406,105 406,125 406.15,125 406.15,642 27.15,642 27.15,125 28.15,125 28.15,105
  region: 285.75,105 363.15,105 363.15,125 285.75,125
DIMENSION:
  drawing of 373 lines, arcs and shapes, not listed
  text "4 LAYER CROSS SECTION BUILD - CONTROLLED IMPEDANCE" at -6458.24,4425.14 h25
  text "MASK" at -6368.48,4289.16 h25
  text "1 oz" at -5440.45,4206.14 h25
  text "TOP" at -6338.95,4200.57 h25
  text "ROUTING" at -5157.86,4200.57 h25
  text "PREPREG" at -6122.43,4111.99 h25
  text "0.2 mm" at -5777.93,4111.99 h25
  text "1 oz" at -5436.24,4030.14 h25
  text "L2_INNER" at -6525.96,4023.41 h25
  text "PLANE" at -5157.86,4023.41 h25
  text "0.45mm" at -5776.24,3943.14 h25
  text "CORE" at -6122.43,3934.83 h25
  text "ROUTING" at -5154.24,3860.14 h25
  text "1 oz" at -5432.24,3854.14 h25
  text "L3_INNER" at -6525.96,3846.24 h25
  text "0.2 mm" at -5778.45,3761.14 h25
  text "PREPREG" at -6122.43,3757.66 h25
  text "BOTTOM" at -6525.96,3669.08 h25
  text "1 oz" at -5443.28,3669.08 h25
  text "ROUTING" at -5157.86,3669.08 h25
  text "MASK" at -6369.32,3575.16 h25
  text "1.00 mm" at -5330.43,3426.68 h25
  text "BOARD THICKNESS AFTER PLATING:" at -6595.69,3407.84 h25
  text "Other Notes:" at -6597.04,3310.64 h25
  text "All vias should be filled with soldmask" at -6053.04,3310.64 h25
  text "1." at -6183.74,3300.64 h25
  text "SIGNAL       IMPEDANCE" at -6032.35,2203.11 h25
  text "S1" at -6285.97,2139.6 h50
  text "50 ohms +/- 10%" at -5872.57,2119.92 h25
  text "Trace Width:" at -6039.89,2011.65 h25
  text "13.20 mils" at -5439.51,2011.65 h25
  text "Spacing:" at -5892.25,1903.38 h25
  text "12.00 mils" at -5442.43,1901.68 h25
  text "On Layers:" at -5961.15,1785.27 h25
  text "1" at -5439.51,1785.27 h25
  text "Referenced To:" at -6118.63,1657.32 h25
  text "2" at -5439.51,1657.32 h25
  text "Note:RF" at -6118.63,1539.21 h25
  text "11" at 181.1,874.02 h65
  text "63" at 319.83,459.86 h25 r180
  text "110" at 314.77,397.77 h25 r180
  text "17" at 822.83,295.67 h65 r90
  text "UNIT: MM" at 212.27,-178.83 h65
NCLEGEND-1-4:
  lines w1: -10173.9,-7110.67 -10165.91,-7110.67 ; -10169.91,-7114.66 -10169.91,-7106.67 ; -6739.28,2.68 -4249.28,2.68 ; -6739.28,132.68 -4249.28,132.68 ; -6739.28,262.68 -4249.28,262.68 ; -6739.28,392.68 -4249.28,392.68 ; -6513.27,67.68 -6505.28,67.68 ; -6509.28,63.68 -6509.28,71.67 ; -6279.28,-127.32 -6279.28,262.68 ; -5299.28,-127.32 -5299.28,262.68 ; -4644.28,-127.32 -4644.28,262.68 ; -10189.91,-7260.67 -10189.91,-7220.67 -10149.91,-7220.67 -10149.91,-7260.67 -10189.91,-7260.67 ; -6739.28,-127.32 -6739.28,642.68 -4249.28,642.68 -4249.28,-127.32 -6739.28,-127.32 ; -6529.28,-82.32 -6489.28,-82.32 -6489.28,-42.32 -6529.28,-42.32 -6529.28,-82.32
  text "DRILL CHART: TOP to BOTTOM" at -6170.28,545.18 h65
  text "ALL UNITS ARE IN MILS" at -6040.28,295.18 h65
  text "FIGURE" at -6665.28,165.18 h65
  text "SIZE" at -5893.28,165.18 h65
  text "PLATED" at -5127.78,165.18 h65
  text "QTY" at -4524.78,165.18 h65
  text "7.99" at -5893.28,35.18 h65
  text "PLATED" at -5127.78,35.18 h65
  text "128" at -4524.78,35.18 h65
  text "40.0" at -5893.28,-94.82 h65
  text "PLATED" at -5127.78,-94.82 h65
  text "4" at -4472.78,-94.82 h65
PEN1:
  lines w1: -7884.24,6361.14 5399.96,6361.14 ; -7869.04,-2150.86 -7869.04,6351.14 ; -7859.24,-2150.86 5399.96,-2150.86 5399.96,6351.14
  lines w6: 1774.96,-1700.86 2899.96,-1700.86 ; 1774.96,-1550.86 4049.96,-1550.86 ; 2899.96,-2150.86 2899.96,-1550.86 ; 2924.96,-2150.86 2924.96,-1550.86 ; 2924.96,-2000.86 4049.96,-2000.86 ; 2924.96,-1850.86 4049.96,-1850.86 ; 2924.96,-1700.86 4049.96,-1700.86 ; 3449.96,-2150.86 3449.96,-2000.86 ; 3449.96,-1850.86 3524.96,-1850.86 3524.96,-1700.86 ; 3549.96,-1850.86 3549.96,-1700.86 ; 4049.96,-2150.86 4049.96,-1225.86 ; 4074.96,-2150.86 4074.96,-1225.86 ; 4074.96,-2000.86 5399.96,-2000.86 ; 4074.96,-1850.86 5399.96,-1850.86 ; 4074.96,-1700.86 5399.96,-1700.86 ; 4074.96,-1550.86 5399.96,-1550.86 ; 4074.96,-1400.86 5399.96,-1400.86 ; 5074.96,-2150.86 5074.96,-1400.86 ; 5099.96,-2150.86 5099.96,-1400.86 ; 1774.96,-2150.86 1774.96,-1225.86 5399.96,-1225.86 5399.96,-2150.86 1774.96,-2150.86
  text "Taolink" at 2205.96,-1490.86 h85
  text "Design rules check" at 4124.96,-1500.86 h35
  text "0" at 5149.96,-1525.86 h35
  text "PCB Specification" at 1924.96,-1650.86 h35
  text "Unconnected Pin" at 4124.96,-1650.86 h35
  text "ELRS_RX_MODULE_V1.0-20251206" at 3028.46,-1653.96 h35
  text "0" at 5149.96,-1675.86 h35
  text "4" at 3049.96,-1800.86 h35
  text "Layer" at 3174.96,-1800.86 h35
  text "Plane error" at 4124.96,-1800.86 h35
  text "T=1.00MM" at 3575.96,-1813.86 h35
  text "0" at 5149.96,-1825.86 h35
  text "2025-12-06  17:30" at 2994.96,-1950.36 h35
  text "High Speed error" at 4124.96,-1950.86 h35
  text "X" at 5149.96,-1975.86 h35
  text "BJT" at 3679.87,-2100.36 h35
  text "Design by" at 2974.96,-2100.86 h35
  text "Test Points error" at 4124.96,-2100.86 h35
  text "X" at 5149.96,-2125.86 h35
ASSEMBLY_TOP:
  lines w7.99: 31.97,492.01 31.97,491.89 32.21,491.89 32.21,510.98 ; 32.17,616.97 32.17,652.99 387.17,652.99

## Text inside footprints (layer, text, board x,y; h text height)
B1: PIN_NUMBER "2" at 61.02,187.15 h40 r90; PIN_NUMBER "1" at 61.02,224.95 h40 r90
B4: PIN_NUMBER "1" at 260.32,375.2 h7.87; PIN_NUMBER "2" at 283.94,375.2 h7.87
B5: PIN_NUMBER "1" at 17.8,383.46 h7.87; PIN_NUMBER "2" at 41.42,383.46 h7.87
B6: PIN_NUMBER "1" at 234.01,484.81 h7.87 r270; PIN_NUMBER "2" at 234.01,461.19 h7.87 r270
B7: PIN_NUMBER "2" at 390.16,281.75 h40 r90; PIN_NUMBER "1" at 390.16,243.96 h40 r90
B8: PIN_NUMBER "1" at 262,513.81 h7.87 r90; PIN_NUMBER "2" at 262,490.19 h7.87 r90
C1: PIN_NUMBER "1" at 42.91,239.53 h50 r90; PIN_NUMBER "2" at 42.91,272.6 h50 r90
C2: PIN_NUMBER "1" at 66.93,255.59 h7.87 r90; PIN_NUMBER "2" at 66.93,279.21 h7.87 r90
C3: PIN_NUMBER "2" at 309.84,194.57 h7.87 r270; PIN_NUMBER "1" at 309.84,170.95 h7.87 r270
C5: PIN_NUMBER "2" at 291.93,405.91 h50; PIN_NUMBER "1" at 258.82,405.91 h50
C6: PIN_NUMBER "2" at 118.06,423.98 h7.87 r90; PIN_NUMBER "1" at 118.06,400.36 h7.87 r90
C7: PIN_NUMBER "2" at 33.86,207.56 h7.87 r90; PIN_NUMBER "1" at 33.86,183.94 h7.87 r90
C10: PIN_NUMBER "2" at 335.12,375.98 h7.87 r180; PIN_NUMBER "1" at 311.49,375.98 h7.87 r180
C11: PIN_NUMBER "1" at 235.81,421.21 h7.87; PIN_NUMBER "2" at 212.19,421.21 h7.87
C12: PIN_NUMBER "1" at 81.42,360.04 h7.87 r180; PIN_NUMBER "2" at 57.8,360.04 h7.87 r180
C14: PIN_NUMBER "2" at 57.8,336.61 h7.87 r180; PIN_NUMBER "1" at 81.42,336.61 h7.87 r180
C18: PIN_NUMBER "1" at 401.18,280.63 h7.87 r270; PIN_NUMBER "2" at 401.18,257.01 h7.87 r270
C19: PIN_NUMBER "1" at 339.84,378.74 h7.87 r180; PIN_NUMBER "2" at 363.46,378.74 h7.87 r180
C22: PIN_NUMBER "2" at 94.88,231.02 h7.87 r90; PIN_NUMBER "1" at 94.88,254.64 h7.87 r90
C23: PIN_NUMBER "1" at 245.98,596.46 h7.87 r180; PIN_NUMBER "2" at 222.36,596.46 h7.87 r180
C24: PIN_NUMBER "1" at 171.69,417.68 h7.87; PIN_NUMBER "2" at 195.31,417.68 h7.87
C25: PIN_NUMBER "2" at 166.54,528.44 h7.87 r90; PIN_NUMBER "1" at 166.54,504.81 h7.87 r90
C26: PIN_NUMBER "1" at 246.38,575.59 h7.87 r180; PIN_NUMBER "2" at 222.76,575.59 h7.87 r180
C28: PIN_NUMBER "1" at 245.99,626.77 h7.87 r180; PIN_NUMBER "2" at 222.36,626.77 h7.87 r180
C29: PIN_NUMBER "1" at 60.95,250 h7.87; PIN_NUMBER "2" at 29.85,250 h7.87
C30: PIN_NUMBER "1" at 60.16,220.87 h7.87; PIN_NUMBER "2" at 29.06,220.87 h7.87
C35: PIN_NUMBER "2" at 184.96,134.25 h7.87 r180; PIN_NUMBER "1" at 208.58,134.25 h7.87 r180
C36: PIN_NUMBER "1" at 164.17,417.24 h7.87 r90; PIN_NUMBER "2" at 164.17,393.62 h7.87 r90
C40: PIN_NUMBER "2" at 186.52,528.43 h7.87 r90; PIN_NUMBER "1" at 186.52,504.8 h7.87 r90
C41: PIN_NUMBER "1" at 246.46,565.28 h7.87 r270; PIN_NUMBER "2" at 246.46,541.66 h7.87 r270
C42: PIN_NUMBER "2" at 206.5,528.43 h7.87 r90; PIN_NUMBER "1" at 206.5,504.8 h7.87 r90
C43: PIN_NUMBER "2" at 313.86,541.73 h7.87; PIN_NUMBER "1" at 290.24,541.73 h7.87
C44: PIN_NUMBER "1" at 405.43,624.02 h7.87 r180; PIN_NUMBER "2" at 381.81,624.02 h7.87 r180
C76: PIN_NUMBER "2" at 242,473.81 h7.87 r270; PIN_NUMBER "1" at 242,450.19 h7.87 r270
C78: PIN_NUMBER "1" at 340.85,454.79 h7.87 r90; PIN_NUMBER "2" at 340.85,431.17 h7.87 r90
C79: PIN_NUMBER "2" at 301.81,434.98 h7.87; PIN_NUMBER "1" at 278.19,434.98 h7.87
C80: PIN_NUMBER "2" at 318.19,414.13 h7.87; PIN_NUMBER "1" at 341.81,414.13 h7.87
C183: PIN_NUMBER "1" at 393.7,128.42 h7.87 r270; PIN_NUMBER "2" at 393.7,152.05 h7.87 r270
C185: PIN_NUMBER "2" at 393.31,150.12 h7.87 r270; PIN_NUMBER "1" at 393.31,181.23 h7.87 r270
C188: PIN_NUMBER "1" at 221.73,102.76 h7.87 r180; PIN_NUMBER "2" at 252.83,102.76 h7.87 r180
C191: PIN_NUMBER "2" at 300.47,302.76 h7.87 r180; PIN_NUMBER "1" at 276.85,302.76 h7.87 r180
C192: PIN_NUMBER "2" at 99.31,423.81 h7.87 r90; PIN_NUMBER "1" at 99.31,400.19 h7.87 r90
C193: PIN_NUMBER "2" at 348.5,238.19 h7.87; PIN_NUMBER "1" at 324.88,238.19 h7.87
D2: PIN_NUMBER "2" at 169.29,613.5 h25 r90; PIN_NUMBER "1" at 169.29,581.49 h25 r90
D6: PIN_NUMBER "2" at 57.87,402.6 h25 r90; PIN_NUMBER "1" at 57.87,434.1 h25 r90
J1: PIN_NUMBER "2" at 75.15,650.04 h7.87 r180; PIN_NUMBER "3" at 75.15,533.86 h7.87 r180; PIN_NUMBER "1" at 135.15,591.93 h7.87 r180
J4: PIN_NUMBER "1" at 57.15,50 h7.87; PIN_NUMBER "3" at 257.15,50 h7.87; PIN_NUMBER "4" at 357.15,50 h7.87; PIN_NUMBER "2" at 157.15,50 h7.87
L2: PIN_NUMBER "1" at 167.85,440.03 h40 r180; PIN_NUMBER "2" at 205.65,440.03 h40 r180
L3: PIN_NUMBER "1" at 210.16,466.15 h7.87 r180; PIN_NUMBER "2" at 186.54,466.14 h7.87 r180
L6: PIN_NUMBER "2" at 263.25,425.82 h7.87 r90; PIN_NUMBER "1" at 263.25,402.2 h7.87 r90
L8: PIN_NUMBER "2" at 226.48,528.43 h7.87 r90; PIN_NUMBER "1" at 226.48,504.8 h7.87 r90
L9: PIN_NUMBER "1" at 246.93,541.73 h7.87; PIN_NUMBER "2" at 270.55,541.73 h7.87
L17: PIN_NUMBER "1" at 289.45,636.61 h7.87; PIN_NUMBER "2" at 313.07,636.61 h7.87
L18: PIN_NUMBER "1" at 384,454.79 h7.87 r90; PIN_NUMBER "2" at 384,431.17 h7.87 r90
L22: PIN_NUMBER "2" at 349.21,197.91 h7.87 r90; PIN_NUMBER "1" at 349.21,150.91 h7.87 r90
L23: PIN_NUMBER "2" at 39.49,168.9 h7.87; PIN_NUMBER "1" at 86.49,168.9 h7.87; DRAWING_BOTTOM "Padstack:pad32x35" at 172.99,-1.1 h7.87; DRAWING_BOTTOM "inside pitch:15mil" at 172.99,48.9 h7.87
R4: PIN_NUMBER "1" at 192.59,133.86 h7.87; PIN_NUMBER "2" at 216.22,133.86 h7.87
R11: PIN_NUMBER "1" at 307.48,278.66 h7.87 r90; PIN_NUMBER "2" at 307.48,255.04 h7.87 r90
R14: PIN_NUMBER "1" at 81.1,463.7 h7.87 r270; PIN_NUMBER "2" at 81.1,440.08 h7.87 r270
R20: PIN_NUMBER "2" at 300.79,461.14 h7.87 r270; PIN_NUMBER "1" at 300.79,484.76 h7.87 r270
R21: PIN_NUMBER "1" at 211.81,392.06 h7.87 r90; PIN_NUMBER "2" at 211.81,368.43 h7.87 r90
R24: PIN_NUMBER "2" at 287.01,255.04 h7.87 r90; PIN_NUMBER "1" at 287.01,278.66 h7.87 r90
R25: PIN_NUMBER "1" at 287.4,236.54 h7.87 r90; PIN_NUMBER "2" at 287.4,212.92 h7.87 r90
R37: PIN_NUMBER "2" at 365.18,415.18 h7.87 r270; PIN_NUMBER "1" at 365.18,391.56 h7.87 r270
R77: PIN_NUMBER "2" at 49.61,153.47 h7.87 r270; PIN_NUMBER "1" at 49.61,177.09 h7.87 r270
R80: PIN_NUMBER "2" at 70.08,153.47 h7.87 r270; PIN_NUMBER "1" at 70.08,177.09 h7.87 r270
R81: PIN_NUMBER "2" at 360.71,259.84 h7.87; PIN_NUMBER "1" at 337.09,259.84 h7.87
R83: PIN_NUMBER "2" at 300.87,282.28 h7.87 r180; PIN_NUMBER "1" at 277.25,282.28 h7.87 r180
R85: PIN_NUMBER "2" at 44.71,111.42 h15.75 r270; PIN_NUMBER "1" at 80.71,111.42 h15.75 r270; DRAWING_BOTTOM "inside pitch:12mil" at 162.71,1.42 h7.87
TP5: PIN_NUMBER "1" at 355.97,270.08 h10; PAD_STACK_NAME "SR40" at 438.47,130.58 h49.21
U1: PIN_NUMBER "11" at 299.76,178.64 h40 r90; PIN_NUMBER "26" at 102.91,257.38 h40 r90; PIN_NUMBER "8" at 270.23,141.74 h40 r90; PIN_NUMBER "32" at 102.91,139.27 h40 r90; PIN_NUMBER "4" at 191.49,141.74 h40 r90; PIN_NUMBER "23" at 152.12,306.59 h40 r90; PIN_NUMBER "24" at 132.43,306.59 h40 r90; PIN_NUMBER "16" at 299.76,277.06 h40 r90; PIN_NUMBER "27" at 102.91,237.69 h40 r90; PIN_NUMBER "33" at 201.33,240.17 h40 r90; PIN_NUMBER "28" at 102.91,218.01 h40 r90; PIN_NUMBER "30" at 102.91,178.64 h40 r90; PIN_NUMBER "1" at 132.43,141.74 h40 r90; PIN_NUMBER "2" at 152.12,141.74 h40 r90; PIN_NUMBER "14" at 299.76,237.69 h40 r90; PIN_NUMBER "15" at 299.76,257.38 h40 r90; PIN_NUMBER "21" at 191.49,306.59 h40 r90; PIN_NUMBER "12" at 299.76,198.32 h40 r90; PIN_NUMBER "22" at 171.8,306.59 h40 r90; PIN_NUMBER "5" at 211.17,141.74 h40 r90; PIN_NUMBER "18" at 250.54,306.59 h40 r90; PIN_NUMBER "17" at 270.23,306.59 h40 r90; PIN_NUMBER "29" at 102.91,198.32 h40 r90; PIN_NUMBER "31" at 102.91,158.95 h40 r90; PIN_NUMBER "20" at 211.17,306.59 h40 r90; PIN_NUMBER "6" at 230.86,141.74 h40 r90; PIN_NUMBER "10" at 299.76,158.95 h40 r90; PIN_NUMBER "9" at 299.76,171.27 h40 r90; PIN_NUMBER "25" at 102.91,277.06 h40 r90; PIN_NUMBER "19" at 230.86,306.59 h40 r90; PIN_NUMBER "13" at 299.76,218.01 h40 r90; PIN_NUMBER "3" at 171.8,141.74 h40 r90; PIN_NUMBER "7" at 250.54,141.74 h40 r90
U2: PIN_NUMBER "2" at 331.43,585.92 h40 r90; PIN_NUMBER "3" at 331.43,611.51 h40 r90; PIN_NUMBER "6" at 265.29,560.33 h40 r90; PIN_NUMBER "5" at 265.29,585.92 h40 r90; PIN_NUMBER "4" at 265.29,611.51 h40 r90; PIN_NUMBER "1" at 331.43,560.33 h40 r90
U4: PIN_NUMBER "6" at 162.55,156.97 h29.53 r270; PIN_NUMBER "1" at 163.55,254.97 h29.53 r270; PIN_NUMBER "3" at 249.55,254.97 h29.53 r270; PIN_NUMBER "5" at 207.55,155.97 h29.53 r270; PIN_NUMBER "4" at 241.55,156.97 h29.53 r270; PIN_NUMBER "2" at 207.55,255.97 h29.53 r270; DISPLAY_TOP "1.6X2.9X1.5MM(BODY SIZE)" at 344.38,284.37 h7.87 r270; DISPLAY_TOP "2.8X2.9X1.5mm(ALL)" at 389.66,284.37 h7.87 r270
U9: PIN_NUMBER "3" at 405,598.81 h29.53 r90; PIN_NUMBER "2" at 363,599.81 h29.53 r90; PIN_NUMBER "5" at 363,499.81 h29.53 r90; PIN_NUMBER "6" at 318,500.81 h29.53 r90; PIN_NUMBER "1" at 319,598.81 h29.53 r90; PIN_NUMBER "4" at 397,500.81 h29.53 r90
X1: PIN_NUMBER "2" at 390.5,336.85 h25 r90; PIN_NUMBER "3" at 355.11,336.85 h25 r90; PIN_NUMBER "1" at 390.5,285.63 h25 r90; PIN_NUMBER "4" at 355.11,285.63 h25 r90